# Altium PCB 显示面板.PcbDoc
Units mm, origin at the board's own origin, x right, y up, seen from the top; angles counter-clockwise.
Board outline 130.25 x 50.27 mm, 2 copper layers (Top Layer, Bottom Layer); 14 components, 21 nets, 78 pads, 0 vias.
Unrouted connection lines stored in the file: 41.
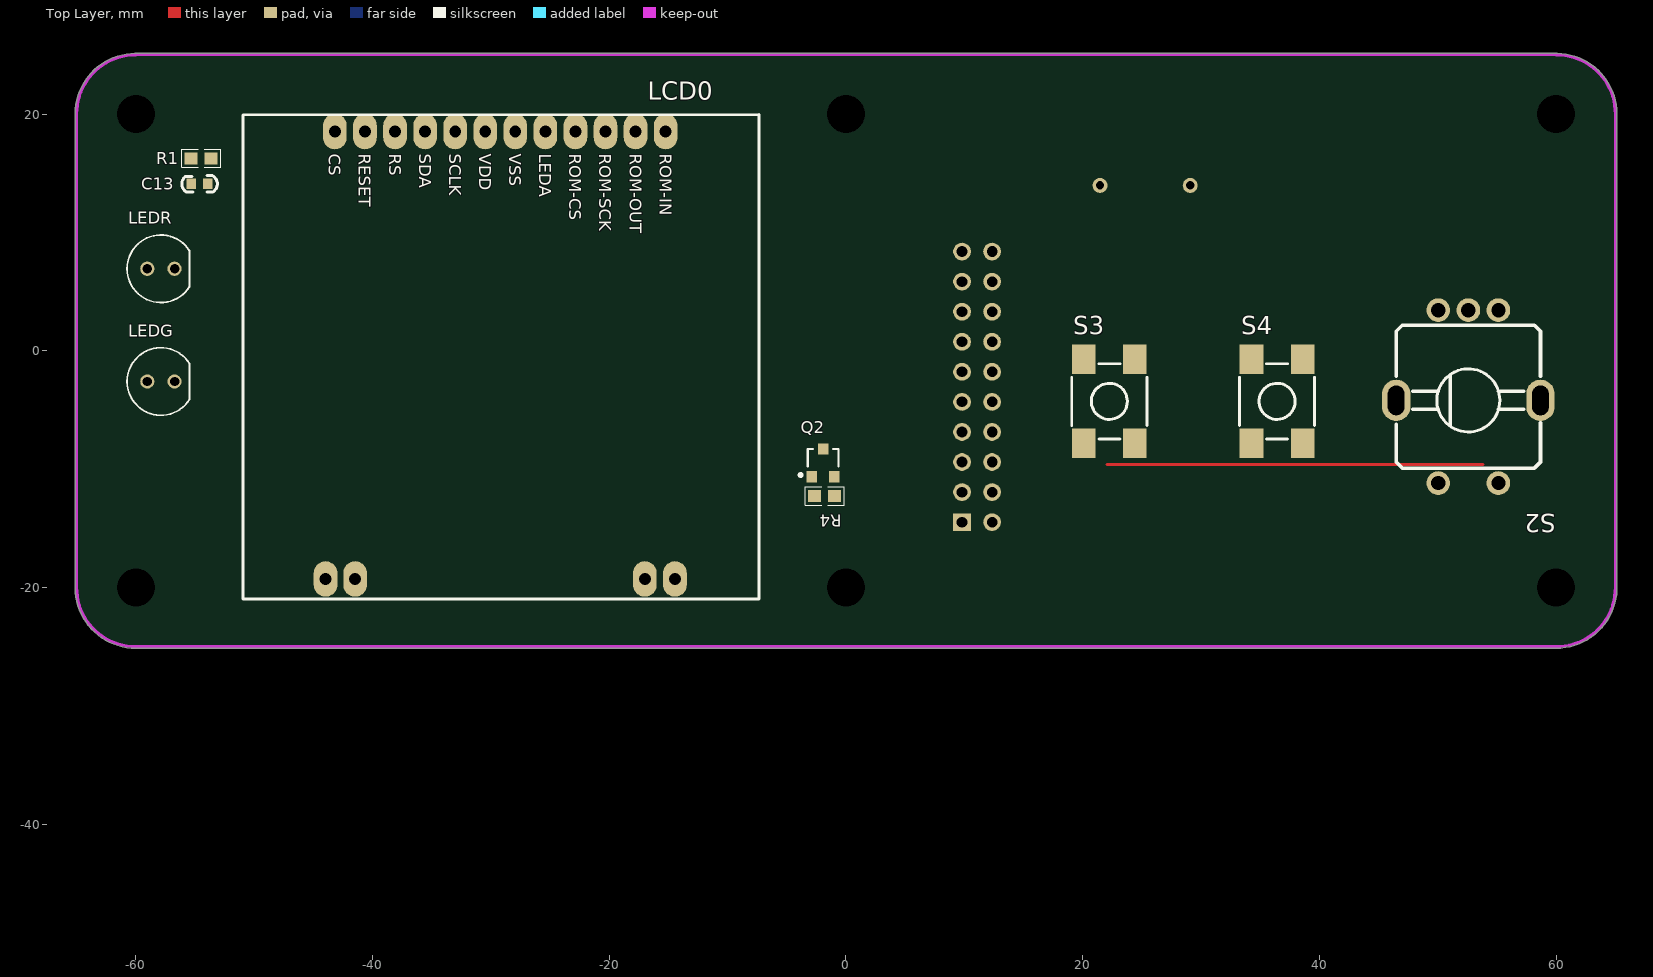
[diagram p0: Top Layer view]
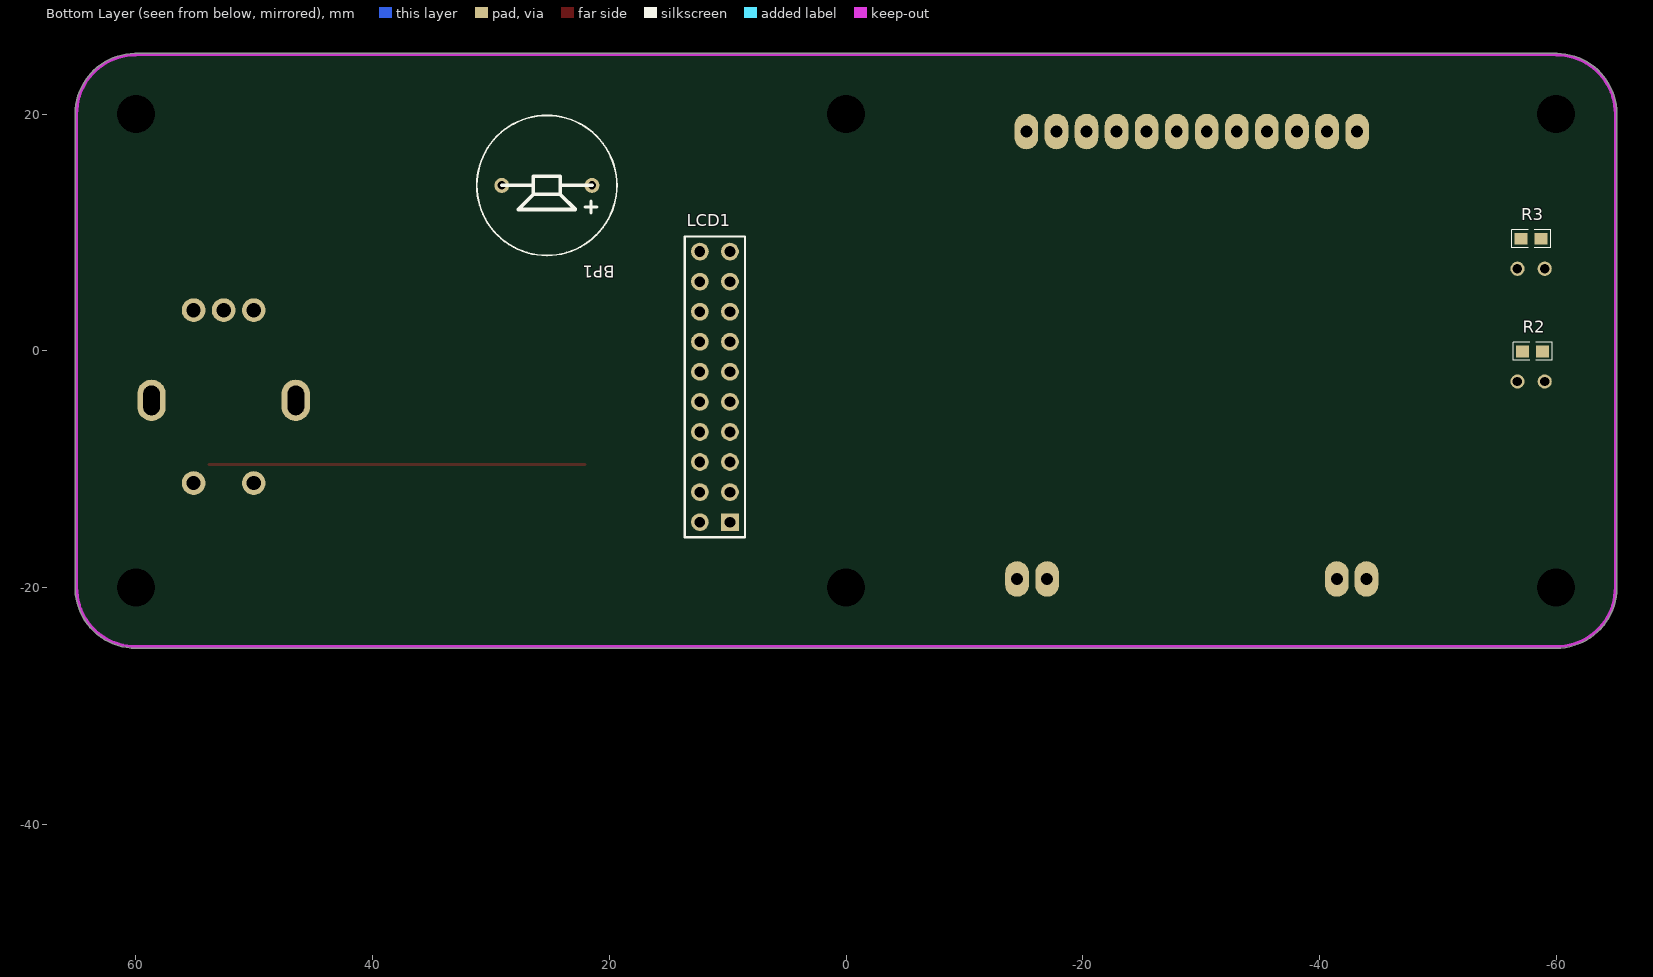
[diagram p1: Bottom Layer view, seen from below]

## Layer stack, top to bottom
Top Solder: solder mask 0.0102, Solder Resist, Dk 3.5
Top Layer: signal copper 0.0356
Dielectric 1: dielectric 0.32, FR-4, Dk 4.8
Bottom Layer: signal copper 0.0356
Bottom Solder: solder mask 0.0102, Solder Resist, Dk 3.5

## Board outline
-65.127,-20 cw(c-65,-20) -65.121,-19.959 cw(c-65,-19.918) -65.127,-19.918 -65.127,20.009 cw(c-65,20.009) -65.127,20.009 cw(c-60,20) -60.057,25.127 cw(c-59.99,25.019) -59.99,25.146 60,25.146 cw(c60,25.019) 60.068,25.127 cw(c60,20) 65.127,20.023 cw(c65,20.019) 65.127,20.019 65.127,-20.132 cw(c65,-20.132) 65.125,-20.157 cw(c60,-20) 60.39,-25.113 cw(c60.33,-25) 60.33,-25.127 -60,-25.127 cw(c-60,-20)

## Design rules (kind name [scope] priority, off if disabled: settings)
Clearance [All] p1: gap=0.254
PolygonConnect [All] p1: connectstyle=Relief reliefconductorwidth=0.254 reliefentries=4 polygonreliefangle="90 Angle" airgapwidth=0.254
RoutingVias [All] p1: holewidth=0.711 width=1.27 viastyle="Through Hole" minholewidth=0.711 minwidth=1.27 maxholewidth=0.711 maxwidth=1.27
SolderMaskExpansion [All] p1: expansion=0.102
Width [All] p1: maxlimit=0.254 minlimit=0.254 preferedwidth=0.254
30 further rules are at their usual default settings.

## Components (designator, comment, footprint, x,y, rotation, side; value= is the part's Value field where it differs from the comment)
BP1 "BUZZER" 蜂鸣器 25.273,13.97 r0 bottom
C13 "104" 0603C -54.61,14.097 r180 top
LCD0 "12864" LCD12864-1.7inch -29.21,-0.381 r0 top
LCD1 "LCD" HDR10X2_A1 9.803,-14.478 r90 bottom
LEDG "COLOUR" LEDφ6 -59.031,-2.596 r0 top
LEDR "COLOUR" LEDφ6 -59.031,6.929 r0 top
Q2 "CJ2304" SOT-23 -1.933,-9.477 r0 top
R1 "Res1" 0603-1 -54.483,16.256 r0 top
R2 "Res1" 0603-1 -58.015,-0.056 r0 bottom
R3 "Res1" 0603-1 -57.888,9.469 r0 bottom
R4 "Res1" 0603-1 -1.806,-12.271 r180 top
S2 "SW-EC11" EC11 52.578,-4.191 r180 top
S3 "SW-PB4" SW_PB4_A1 22.249,-4.27 r90 top
S4 "SW-PB4" SW_PB4_A1 36.421,-4.27 r90 top

## Footprints (in the part's own frame and the unit in brackets; to place one, negate y for a bottom-side part, rotate by r counter-clockwise, add the part's x,y. Pads: shape width x height; smd on the part's side, far side on the other; paste and mask are expansions set on the pad)
0603-1 [mm] "贴片带丝印"
  rect 1.1x1 smd: 1(-0.85,0) 2(0.85,0)
  silkscreen extent -1.65,-0.76 1.65,0.76, body extent -0.8,-0.38 0.8,0.42, height 0.3
0603C [mm]
  rect 0.8x0.9 smd: 1(-0.7,0) 2(0.7,0)
  silkscreen extent -1.5,-0.69 1.5,0.69, body extent -0.77,-0.4 0.83,0.4, height 0.3
EC11 [mm]
  round 2 hole 1.2: 1(-2.54,-7.62) 2(0,-7.62) 3(2.54,-7.62) 4(2.54,6.985) 5(-2.54,6.985)
  oval 2.4x3.5 hole 1.4 slot 2.5 at 90 deg: 6(-6.096,0) 7(6.096,0)
  silkscreen extent -6.1,-6.35 6.1,5.72, body extent -7.63,-9.13 7.37,8.87, height 24.5
HDR10X2_A1 [mm] "Connector; Header; 10x2 Position"
  rect 1.5x1.5 hole 0.9: 1(0,0)
  round 1.5 hole 0.9: 2(0,2.54) 3(2.54,0) 4(2.54,2.54) 5(5.08,0) 6(5.08,2.54) 7(7.62,0) 8(7.62,2.54) 9(10.16,0) 10(10.16,2.54) 11(12.7,0) 12(12.7,2.54) 13(15.24,0) 14(15.24,2.54) 15(17.78,0) 16(17.78,2.54) 17(20.32,0) 18(20.32,2.54) 19(22.86,0) 20(22.86,2.54)
  silkscreen extent -1.27,-1.27 24.13,3.81
LCD12864-1.7inch [mm] "1.7寸12864spi屏"
  oval 2x3 hole 1: 0(-14.76,-18.9) 0(-12.26,-18.9) 0(12.22,-18.9) 0(14.76,-18.9) 1(13.97,18.9) 2(11.43,18.9) 3(8.89,18.9) 4(6.35,18.9) 5(3.81,18.9) 6(1.27,18.9) 7(-1.27,18.9) 8(-3.81,18.9) 9(-6.35,18.9) 10(-8.89,18.9) 11(-11.43,18.9) 12(-13.97,18.9)
  silkscreen extent -21.72,-20.57 21.84,20.34, body extent -21.72,-20.46 21.78,20.34, height 7.04
LEDφ6 [mm]
  round 1.2 hole 0.8: 1(0,0) 2(2.3,0)
  silkscreen extent -1.7,-2.85 3.56,2.85, body extent -1.86,-2.97 3.74,3.03, height 8.5
SOT-23 [mm]
  rect 0.9x0.95 smd: 1(-0.95,-1.175) 2(0.95,-1.175) 3(0,1.175)
  silkscreen extent -2.03,-1.14 1.3,1.18, body extent -1.45,-1.4 1.45,1.4, height 1.2
SW_PB4_A1 [mm] "6*6轻触按键"
  rect 2.5x2 smd: 1(-3.556,2.159) 2(-3.556,-2.159) 3(3.556,-2.159) 4(3.556,2.159)
  silkscreen extent -3.17,-3.17 3.17,3.17, body extent -4.54,-3.05 4.54,3.15, height 13.1
蜂鸣器 [mil]
  round 50 hole 28: 1(-150,0) 2(150,0)
  silkscreen extent -233,-233 233,233, body extent -236,-236 236,236, height 378

## Part data
BP1: "蜂鸣器"
C13: library part "CAP X", "安规电容"
LCD0: library part LCD12864串口屏, "1.7寸SPI12864屏"
LCD1: library part "Header 10X2", "Header, 10-Pin"
LEDG LEDR: library part ledφ6
Q2: library part MOSFET-N, "N-Channel MOSFET"
R1 R2 R3 R4: "贴片电阻"
S2: "旋转编码开关"
S3 S4: "微动开关"

## Free pads (board coordinates)
  round 1.5 hole 3.2: 0(-60,20) 1(-60,-20) 1(0,-20) 1(0,20) 1(60,-20) 1(60,20) 2(-55,-46.981) 3(-5,-46.981)

## Nets (pads, with @x,y where several pads share a name; then routed paths per layer and width w, separated by ;. In a path a pad name is that pad's centre, name@x,y a point inside that pad or via, vN(x,y) a via of type N, cw(c..) or ccw(c..) an arc to the next point about the centre after c; other vN are vias at no path point)
+5V: BP1.1 LCD1.2
BUZZ: LCD1.18 Q2.1 R4.2
FONT_CS: LCD0.4 LCD1.6
GND: C13.1 LCD0.6 LCD1.19 LCD1.20 Q2.2 R4.1 S2.2 S2.4 S3.2 S3.3 S4.2 S4.3
LCD_CS: LCD0.12 LCD1.8
LCD_RS: LCD0.10 LCD1.7
LEDG: LCD1.11 LEDG.2
LEDR: LCD1.12 LEDR.2
NetBP1_2: BP1.2 Q2.3
NetC13_2: C13.2 LCD0.11 R1.1
NetLEDG_1: LEDG.1 R2.1
NetLEDR_1: LEDR.1 R3.1
SW-3: LCD1.14 S3.1 S3.4
SW-4: LCD1.16 S4.1 S4.4
SW_A: LCD1.10 S2.1
SW_B: LCD1.13 S2.3
SW_O: LCD1.9 S2.5
TFT_CLK: LCD0.3 LCD0.8 LCD1.5
TFT_MISO: LCD0.2 LCD1.15
TFT_MOSI: LCD0.1 LCD0.9 LCD1.17
VCC3.3: LCD0.5 LCD0.7 LCD1.1 R1.2 R2.2 R3.2
pads on no net: LCD0.0 LCD1.3 LCD1.4 S2.6 S2.7
copper on no net: | length 31.8
  Top Layer w0.254: 22.07,-9.604 53.82,-9.604

## Keep-outs
Keep-Out Layer:
  lines w0.254: -65,-20 ccw(c-60,-20) -60,-25 60.33,-25 ; -65,-19.918 -65,20.009 cw(c-60,20) -60,25 ; -59.99,25.019 60,25.019 ; 59.976,-25 ccw(c60,-20) 65,-20 ; 60,25 cw(c60,20) 65,20 ; 65,-20.132 65,20.019

## Text inside footprints (layer, text, board x,y; h text height)
LCD0: Top Overlay "CS" at -43.688,16.637 h1.02 r270; Top Overlay "RESET" at -41.148,16.637 h1.02 r270; Top Overlay "RS" at -38.608,16.637 h1.02 r270; Top Overlay "SDA" at -36.068,16.637 h1.02 r270; Top Overlay "SCLK" at -33.528,16.637 h1.02 r270; Top Overlay "VDD" at -30.988,16.637 h1.02 r270; Top Overlay "VSS" at -28.448,16.637 h1.02 r270; Top Overlay "LEDA" at -25.908,16.637 h1.02 r270; Top Overlay "ROM-CS" at -23.368,16.637 h1.02 r270; Top Overlay "ROM-SCK" at -20.828,16.637 h1.02 r270; Top Overlay "ROM-OUT" at -18.288,16.637 h1.02 r270; Top Overlay "ROM-IN" at -15.748,16.637 h1.02 r270